# Altium PCB MS5837 V1.0.PcbDoc
Units mil, origin at the board's own origin, x right, y up, seen from the top; angles counter-clockwise.
Board outline 521.84 x 521.84 mil, 2 copper layers (Top Layer, Bottom Layer); 8 components, 6 nets, 25 pads, 7 vias.
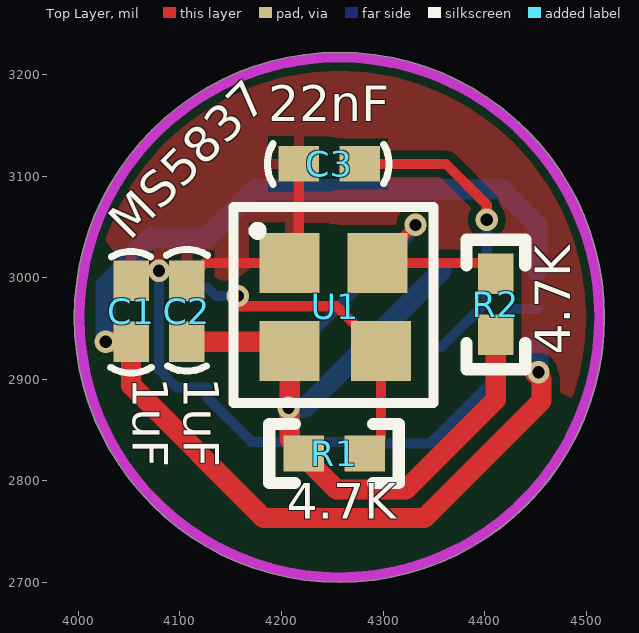
[diagram p0: Top Layer view]
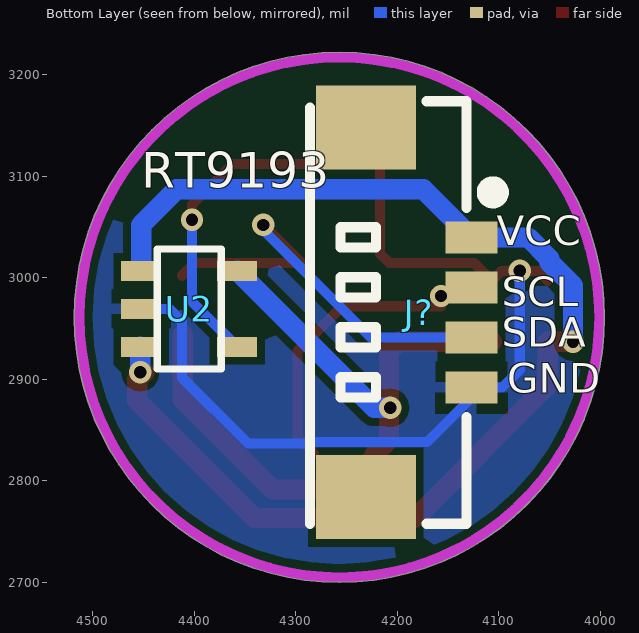
[diagram p1: Bottom Layer view, seen from below]
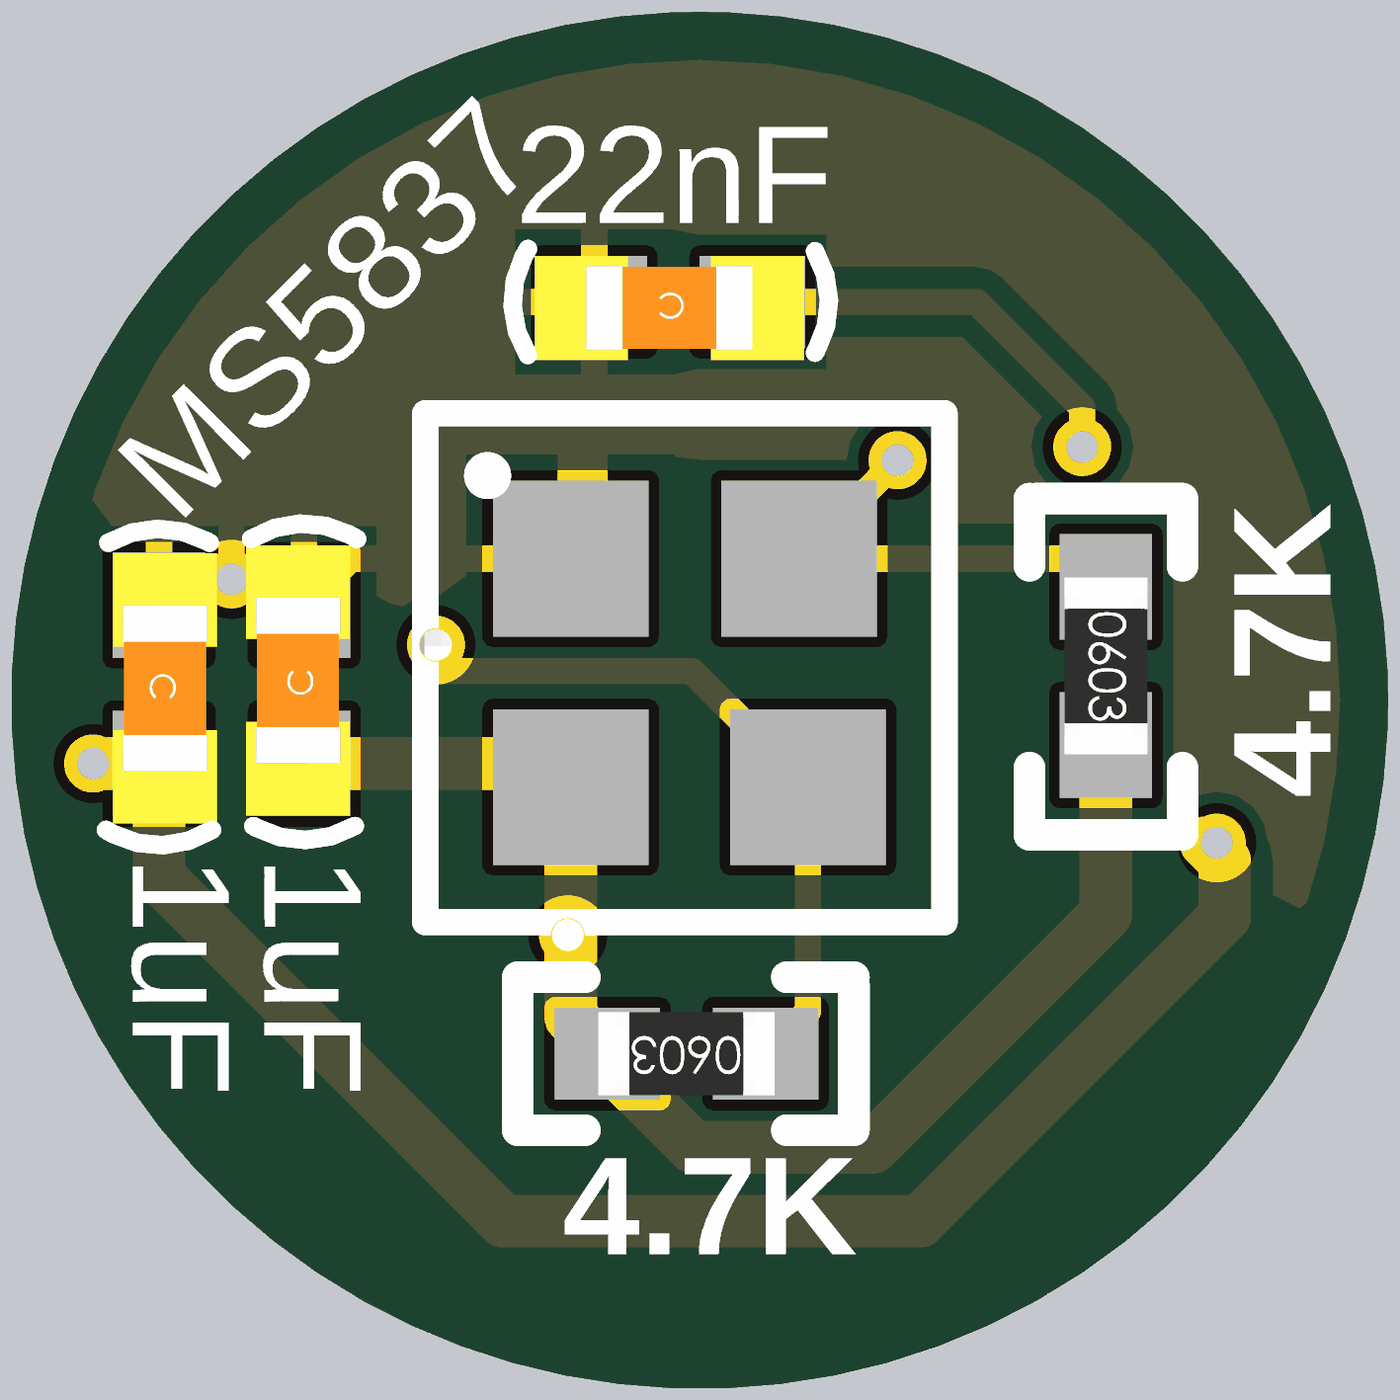
[diagram p2: 3D render of the assembled board from above, using the file's embedded part models]

## Layer stack, top to bottom
Top Solder: solder mask 0.4, Solder Resist, Dk 3.5
Top Layer: signal copper 1.4
Dielectric 1: dielectric 12.6, FR-4, Dk 4.8
Bottom Layer: signal copper 1.4
Bottom Solder: solder mask 0.4, Solder Resist, Dk 3.5

## Board outline
3996.08,2960.89 ccw(c4257,2960.89) 4257,2699.97 ccw(c4257,2960.89) 4517.92,2960.89 ccw(c4257,2960.89) 4257,3221.81 ccw(c4257,2960.89)

## Design rules (kind name [scope] priority, off if disabled: settings)
Clearance [All] p1: gap=8
PolygonConnect [All] p1: connectstyle=Relief reliefconductorwidth=10 reliefentries=4 polygonreliefangle="90 Angle" airgapwidth=10
RoutingVias [All] p1: holewidth=28 width=50 viastyle="Through Hole" minholewidth=28 minwidth=50 maxholewidth=28 maxwidth=50
SolderMaskExpansion [All] p1: expansion=4
Width [All] p1: maxlimit=30 minlimit=7 preferedwidth=10 minimp=50.000000 maximp=50.000000 favimp=50.000000
30 further rules are at their usual default settings.

## Components (designator, comment, footprint, x,y, rotation, side; value= is the part's Value field where it differs from the comment)
C1 "1uF" 0603C 4334,2899.89 r270 top
C2 "1uF" 0603C 3825,3033.89 r90 top
C3 "22nF" 0603C 4180,2829.89 r180 top
J? "MX1.25-4P" MX1.25S-4P 4216,2965.16 r270 bottom locked
R1 "4.7K" 0603R 4280,2825.89 r180 top
R2 "4.7K" 0603R 4412,3001.89 r270 top
U1 "MS5837" MS5837-02BA 4212,2931.89 r0 top locked (schematic designator U?)
U2 "RT9193" SOT23-5 4452,3006.69 r270 bottom

## Footprints (in the part's own frame and the unit in brackets; to place one, negate y for a bottom-side part, rotate by r counter-clockwise, add the part's x,y. Pads: shape width x height; smd on the part's side, far side on the other; paste and mask are expansions set on the pad)
0603C [mil]
  rect 40x35 smd: 1(-97,-282) 2(-37,-282)
  silkscreen extent -126,-302 -6,-262, body extent -117,-299 -14,-260, height 35
0603R [mil]
  rect 40x35 smd: 1(-2,-1) 2(58,-1)
  silkscreen extent -35,-30 92,28, body extent -5,-17 61,15, height 22
MS5837-02BA [mm]
  rect 1.5x1.5 smd: 1(-0.1,2.1) 2(-0.1,-0.1) 3(2.186,-0.1) 4(2.1,2.1)
  silkscreen extent -1.5,-1.4 3.5,3.5
MX1.25S-4P [mm]
  rect 2.1x2.5 smd: 0(-4.632,-0.381) 0(4.604,-0.381)
  rect 0.8x1.3 smd: 1(-1.889,2.261) 2(-0.639,2.261) 3(0.611,2.261) 4(1.861,2.261)
  silkscreen extent -5.29,-1.78 5.27,2.99, body extent -5.02,-1.63 5.13,2.47, height 4.7
SOT23-5 [mm]
  rect 0.5x1 smd: 1(0,0) 2(0.95,0) 3(1.9,0) 4(1.9,2.4) 5(0,2.4)
  silkscreen extent -0.55,0.4 2.45,2, body extent -0.5,-0.2 2.4,2.6, height 1.09

## Part data
C1 C2 C3: library part Cap1, "无极贴片电容"
R1 R2: library part Res, "电阻"
U1: library part MS5837-02BA

## Via types
v1: diameter 22, hole 12, Top Layer to Bottom Layer, 7 vias

## Nets (pads, with @x,y where several pads share a name; then routed paths per layer and width w, separated by ;. In a path a pad name is that pad's centre, name@x,y a point inside that pad or via, vN(x,y) a via of type N, cw(c..) or ccw(c..) an arc to the next point about the centre after c; other vN are vias at no path point)
+3.3V: C2.1 R1.2 R2.2 U1.2 U2.5 | length 724
  Top Layer w20: C2.1 4199.13,2936.89 U1.2 4208.06,2840.82 R1.2 4222,2823.93 4254.54,2791.39 4322.5,2791.39 4411,2879.89 R2.2
  Bottom Layer w20: v1(4207,2871.89) 4222.71,2871.89 U2.5
GND: C1.1 C2.2 C3.2 J?.4 U1.1 U2.2 | length 865.3
  Top Layer w10: C1.1 4061.8,3006.69 v1(4079.5,3006.69) 4097.2,3006.69 C2.2 4124.68,3014.57 U1.1 4217,3023.5 C3.2
  Bottom Layer w10: v1(4079.5,3006.69) 4079.5,2909.39 4097,2891.89 J?.4 4127,2881.89 4170.66,2838.23 4285.6,2838.23 4286.94,2836.89 4347,2836.89 4412,2901.89 4412,2956.89 4424.4,2969.29 U2.2
NetC3_1: C3.1 U2.4 | length 300
  Top Layer w10: C3.1 4362,3111.89 4402,3071.89 v1(4402,3056.89)
  Bottom Layer w10: U2.4 4402,2976.38 v1(4402,3056.89)
SCL: J?.2 R1.1 U1.3 | length 310.5
  Top Layer w10: v1(4157,2981.89) 4157,2971.89 4254.13,2971.89 U1.3 4298.06,2842.95 R1.1
  Bottom Layer w10: J?.2 4135.43,2981.89 v1(4157,2981.89)
SDA: J?.3 R2.1 U1.4 | length 427.7
  Top Layer w10: v1(4332,3051.89) U1.4 4399.32,3014.57 R2.1@4412,3001.89
  Bottom Layer w10: J?.3 4226.21,2941.1 4284.5,2999.39 v1@4334.5,3049.39
VCC: C1.2 J?.1 U2.1 U2.3 | length 1210.8
  Top Layer w20: v1(4027,2936.89) C1.2 4052,2893.89 4182.5,2763.39 4340.5,2763.39 4456,2878.89 4456,2899.89 v1@4449,2906.89
  Bottom Layer w20: v1(4027,2936.89) 4027,2991.89 4050.5,3015.39 4050.5,3018.7 4071.32,3039.53 J?.1 4174.36,3086.89 4417,3086.89 4452,3051.89 U2.1 ; v1(4453,2906.89) U2.3@4453,2931.89
pads on no net: J?.0

## Polygon pours and split planes (outlines as drawn)
no net on Top Layer "Top Layer-GND" (hatched Horizontal grid 20 track 8, pour order 2): 4362,3121.89
GND on Top Layer "Top Layer-No Net" (solid, remove dead copper, pour order 6): 3999,3239 4480,3239 cw(c4480,3139) 4580,3139 4580,2982 4580,2758 cw(c4480,2758) 4480,2658 4466,2658 4058,2658 cw(c4058,2758) 3958,2758 3958,2790 3958,3197 cw(c3999,3197) 3999,3238
no net on Mechanical 1 (solid): 4087,3121.89
GND on Bottom Layer "Top Layer-No Net" (solid, remove dead copper, pour order 8): 3961,3008 3961,3155 cw(c4045,3155) 4045,3239 4449,3239 cw(c4449,3139) 4549,3139 4549,3032 4549,2767 cw(c4449,2767) 4449,2667 4419,2667 4060,2667 cw(c4060,2767) 3960,2767 3960,2840

## Keep-outs
Keep-Out Layer:
  circle w10: c4257,2960.89 r255.91

## Silkscreen, mask and mechanical layers (free items; w line width, h text height)
Bottom Overlay:
  text "VCC" at 4102,3021.89 h50
  text "SCL" at 4097,2961.89 h50
  text "SDA" at 4097,2921.89 h50
  text "GND" at 4092,2876.89 h50